# EAGLE board main_board_rev_2 (EAGLE 9.6.2)
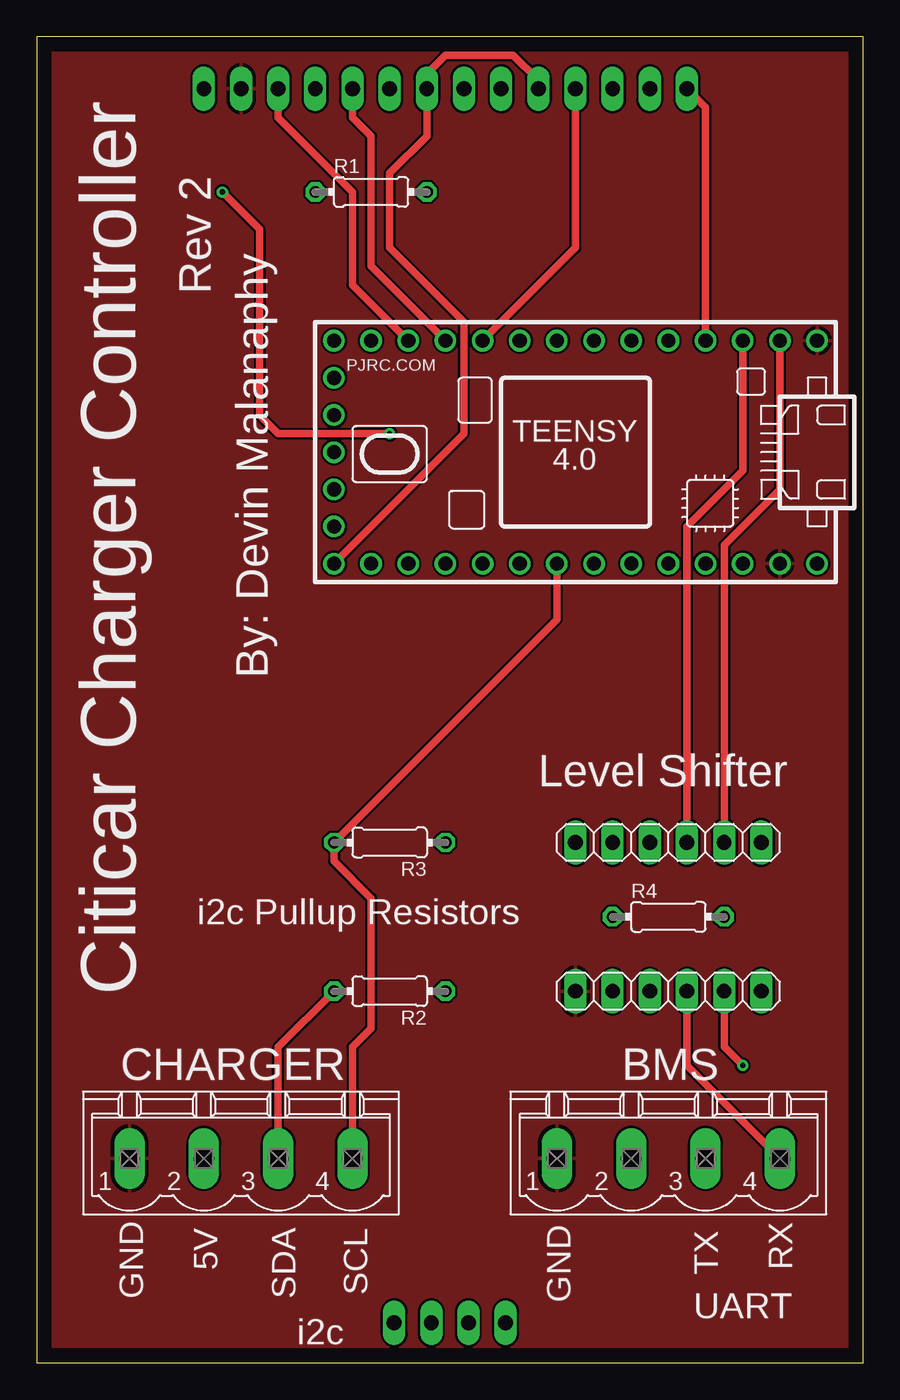
[diagram p0: board, top side]
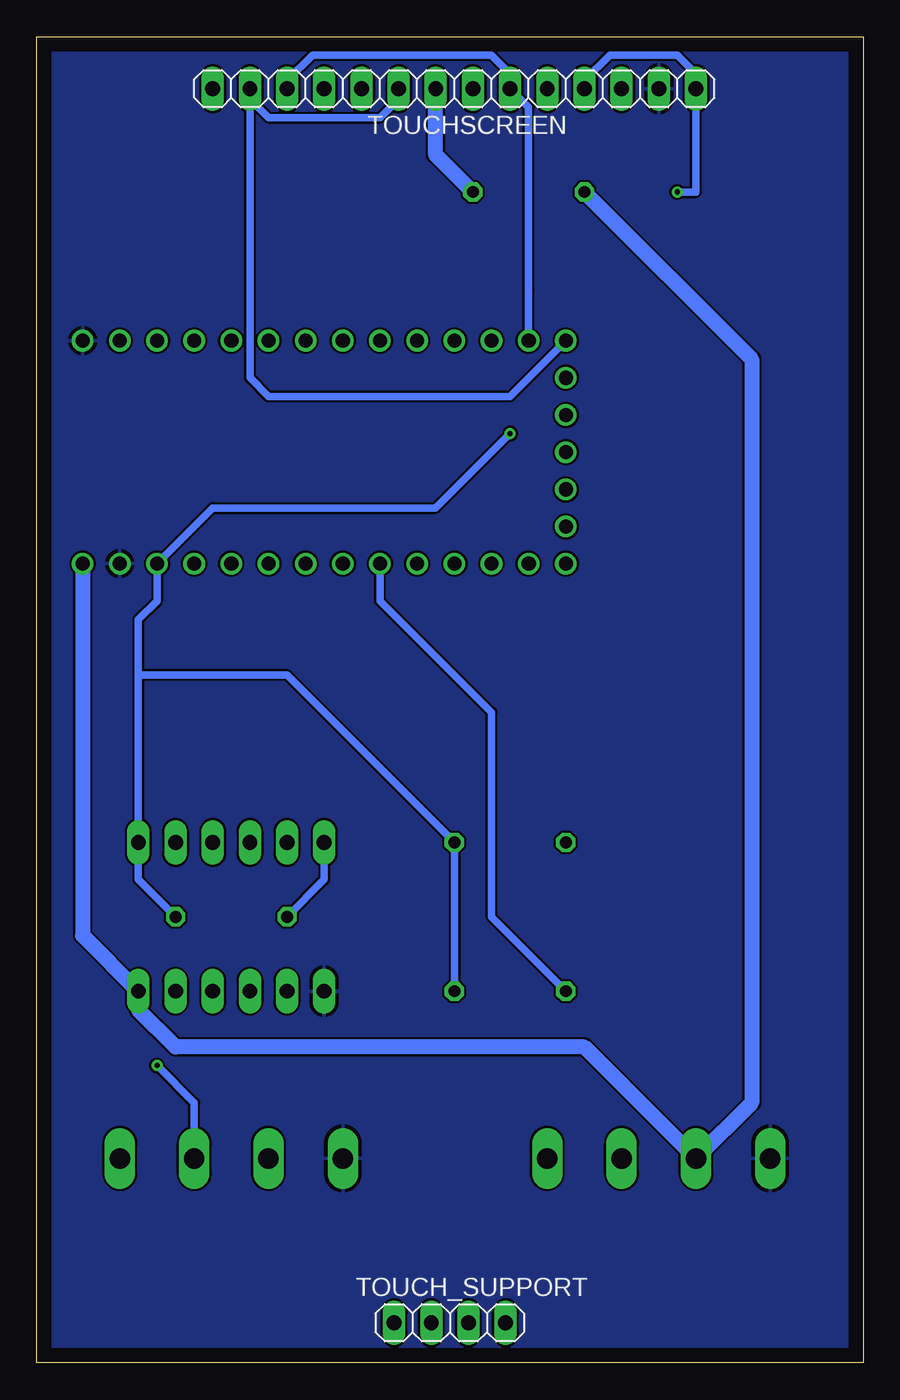
[diagram p1: board, bottom side, seen from below]

Size 56.49 x 90.63 mm. Coordinates in mm from the lower left corner, seen from the top.
Outline: 0,0 56.49,0 56.49,90.63 0,90.63 0,0
Copper layers (1*16): Top 0.035mm / dielectric 1.5mm / Bottom 0.035mm
Design rules "default": minimum track width 6mil, minimum drill 0.35mm, track to track 6mil, track to pad 6mil, pad to pad 6mil, via to via 6mil, smd to smd 6mil, copper to edge 40mil, drill to drill 6mil, minimum pad ring 10mil, minimum via ring 8mil, stop-mask expansion 4mil, vias tented up to drill 0mil, thermal gap 10mil

## Footprints (pad centres in the part's own frame; a part is rotated, then mirrored left to right if it is on the bottom)
MSTBV4 = drill 1.397 long: 1 -7.62,0; 2 -2.54,0; 3 2.54,0; 4 7.62,0
1X06 = drill 1.016 long: 1 -6.35,0; 2 -3.81,0; 3 -1.27,0; 4 1.27,0; 5 3.81,0; 6 6.35,0
0204/7 = drill 0.813 octagon: 1 -3.81,0; 2 3.81,0
1X04 = drill 1.016 long: 1 -3.81,0; 2 -1.27,0; 3 1.27,0; 4 3.81,0
1X14 = drill 1.016 long: 1 -16.51,0; 2 -13.97,0; 3 -11.43,0; 4 -8.89,0; 5 -6.35,0; 6 -3.81,0; 7 -1.27,0; 8 1.27,0; 9 3.81,0; 10 6.35,0; 11 8.89,0; 12 11.43,0; 13 13.97,0; 14 16.51,0
TEENSY_4.0-BASIC = drill 0.965: 0/RX -13.97,-7.62; 1/TX -11.43,-7.62; 2 -8.89,-7.62; 3/CANTX -6.35,-7.62; 3V3_LN 16.51,-2.54; 3V3_LO -11.43,7.62; 4/CANRX -3.81,-7.62; 5 -1.27,-7.62; 6 1.27,-7.62; 7 3.81,-7.62; 8 6.35,-7.62; 9/CS 8.89,-7.62; 10/CS 11.43,-7.62; 11/MOSI 13.97,-7.62; 12/MISO 16.51,-7.62; 13/SCK 16.51,7.62; 14/A0 13.97,7.62; 15/A1 11.43,7.62; 16/A2 8.89,7.62; 17/A3 6.35,7.62; 18/A4/SDA 3.81,7.62; 19/A5/SCL 1.27,7.62; 20/A6 -1.27,7.62; 21/A7 -3.81,7.62; 22/A8 -6.35,7.62; 23/A9 -8.89,7.62; GND -16.51,-7.62; GND2 -13.97,7.62; GND3 16.51,0; ON/OFF 16.51,5.08; PROG 16.51,2.54; VBAT\ 16.51,-5.08; VIN -16.51,7.62

## Placement (x,y rotation side)
BMS  MSTBV4  [MSTBV4]  43.18,13.97 0 top
CHARGER  MSTBV4  [MSTBV4]  13.97,13.97 0 top
LVL_SHIFT_HV  [1X06]  43.18,25.4 180 top
LVL_SHIFT_LV  [1X06]  43.18,35.56 180 top
R1  100  [0204/7]  22.86,80.01 0 top
R2  4.7k  [0204/7]  24.13,25.4 180 top
R3  4.7k  [0204/7]  24.13,35.56 180 top
R4  100  [0204/7]  43.18,30.48 0 top
TOUCH_SUPPORT  [1X04]  28.24,2.74 0 bottom
TOUCHSCREEN  [1X14]  27.94,87.07 180 bottom
U$1  TEENSY_4.0-BASIC  [TEENSY_4.0-BASIC]  36.83,62.23 180 top

## Library data of the parts
BMS CHARGER = con-phoenix-508; MPN: MSTBV 2,5/4-GF-5.08; OC_FARNELL: 1792794; OC_NEWARK: 69R9847
LVL_SHIFT_HV LVL_SHIFT_LV TOUCH_SUPPORT TOUCHSCREEN = pinhead
R1-R4 = rcl; SPICEPREFIX: R
U$1 = Teensy-4.0

## Nets
3.3V: LVL_SHIFT_LV.1 R2.1 R3.1 R4.2 TOUCHSCREEN.1 TOUCHSCREEN.4 U$1.3V3_LO
5V: CHARGER.2 LVL_SHIFT_HV.1 R1.1 U$1.VIN
GND: BMS.1 CHARGER.1 LVL_SHIFT_HV.6 TOUCHSCREEN.2 U$1.GND U$1.GND2
I2C_SCL: CHARGER.4 R3.2 U$1.19/A5/SCL
I2C_SDA: CHARGER.3 R2.2 U$1.18/A4/SDA
LCD_CS: TOUCHSCREEN.3 U$1.10/CS
LCD_DC: TOUCHSCREEN.5 U$1.9/CS
LCD_LED: R1.2 TOUCHSCREEN.8
LVL_SHIFT_OE: LVL_SHIFT_LV.6 R4.1
SPI_CLK: TOUCHSCREEN.7 TOUCHSCREEN.10 U$1.13/SCK
SPI_MISO: TOUCHSCREEN.9 TOUCHSCREEN.13 U$1.12/MISO
SPI_MOSI: TOUCHSCREEN.6 TOUCHSCREEN.12 U$1.11/MOSI
TOUCH_CS: TOUCHSCREEN.11 U$1.8
TOUCH_IRQ: TOUCHSCREEN.14 U$1.2
UART_BMS_RX: BMS.4 LVL_SHIFT_HV.3
UART_BMS_TX: BMS.3 LVL_SHIFT_HV.2
UART_TEENSY_RX: LVL_SHIFT_LV.2 U$1.0/RX
UART_TEENSY_TX: LVL_SHIFT_LV.3 U$1.1/TX

## Tracks (layer width: path | path; a pad name or v marks a point on that pad's centre or on a via)
3.3V  (via drill 0.35)
  Top 0.508: v12.7,80.01 15.24,77.47 15.24,64.77 16.51,63.5 v24.13,63.5
  Bottom 0.508: 49.53,46.99 49.53,50.8 48.26,52.07 U$1.3V3_LO 44.45,58.42 29.21,58.42 v24.13,63.5 | 49.53,46.99 LVL_SHIFT_LV.1 49.53,33.02 R4.2 | R2.1 R3.1 39.37,46.99 49.53,46.99 | v12.7,80.01 11.43,80.01 TOUCHSCREEN.1 11.43,88.09 12.7,89.36 17.32,89.36 19.05,87.63 TOUCHSCREEN.4
5V
  Bottom 1.016: R1.1 7.62,68.58 7.62,17.78 CHARGER.2 19.05,21.59 46.99,21.59 49.53,24.13 LVL_SHIFT_HV.1 53.34,29.21 U$1.VIN
GND
  pour Top: -5.08,93.98 -5.08,-1.27 -1.27,-5.08 57.15,-5.08 62.23,0 62.23,90.17 57.15,95.25 -3.81,95.25
  pour Bottom: 0,95.25 -5.08,90.17 -5.08,-2.54 60.96,-2.54 64.77,1.27 64.77,90.17 60.96,93.98 59.69,95.25
I2C_SCL
  Top 0.508: CHARGER.4 21.59,21.59 22.86,22.86 22.86,31.75 20.32,34.29 R3.2 35.56,50.8 U$1.19/A5/SCL
I2C_SDA
  Top 0.508: CHARGER.3 16.51,21.59 R2.2
  Bottom 0.508: U$1.18/A4/SDA 33.02,52.07 25.4,44.45 25.4,30.48 R2.2
LCD_CS
  Top 0.508: TOUCHSCREEN.3 16.51,85.09 21.59,80.01 21.59,73.66 U$1.10/CS
LCD_DC
  Top 0.508: U$1.9/CS 22.86,74.93 22.86,83.82 21.59,85.09 TOUCHSCREEN.5
  Bottom 0.508: U$1.9/CS 27.94,69.95
LCD_LED
  Bottom 1.016: R1.2 29.21,82.55 TOUCHSCREEN.8
LVL_SHIFT_OE
  Bottom 0.508: R4.1 36.83,33.02 LVL_SHIFT_LV.6
SPI_CLK
  Top 0.508: U$1.13/SCK 29.21,63.5 29.21,71.12 24.13,76.2 24.13,81.28 26.67,83.82 TOUCHSCREEN.7 26.67,88.09 27.94,89.36 32.56,89.36 34.29,87.63 TOUCHSCREEN.10
SPI_MISO
  Bottom 0.406: 41.91,67.31 41.91,86.36
  Bottom 0.508: TOUCHSCREEN.9 31.75,86.36 33.02,85.09 40.64,85.09 41.91,86.36 TOUCHSCREEN.13 41.91,67.31 40.64,66.04 24.13,66.04 U$1.12/MISO
SPI_MOSI
  Bottom 0.508: 22.86,73.42 U$1.11/MOSI 22.86,85.8 TOUCHSCREEN.6 24.13,88.09 25.4,89.36 37.64,89.36 39.37,87.63 TOUCHSCREEN.12
TOUCH_CS
  Top 0.508: TOUCHSCREEN.11 36.83,76.2 U$1.8
TOUCH_IRQ
  Top 0.508: TOUCHSCREEN.14 45.72,85.81 U$1.2
UART_BMS_RX
  Top 0.508: BMS.4 44.45,20.32 LVL_SHIFT_HV.3
UART_BMS_TX  (via drill 0.35)
  Top 0.508: v48.26,20.32 46.99,21.59 LVL_SHIFT_HV.2
  Bottom 0.508: BMS.3 45.72,17.78 v48.26,20.32
UART_TEENSY_RX
  Top 0.508: U$1.0/RX 50.8,59.69 46.99,55.88 LVL_SHIFT_LV.2
UART_TEENSY_TX
  Top 0.508: U$1.1/TX 48.26,60.96 44.45,57.15 LVL_SHIFT_LV.3

## Text on the board
tNames: Rev 2 | By: Devin Malanaphy | Level Shifter | i2c Pullup Resistors | Citicar Charger Controller | 5V | TX | RX | SCL | GND | SDA | GND | UART | i2c
tValues: 5V